# Allegro board CC2650_SensorTag.brd
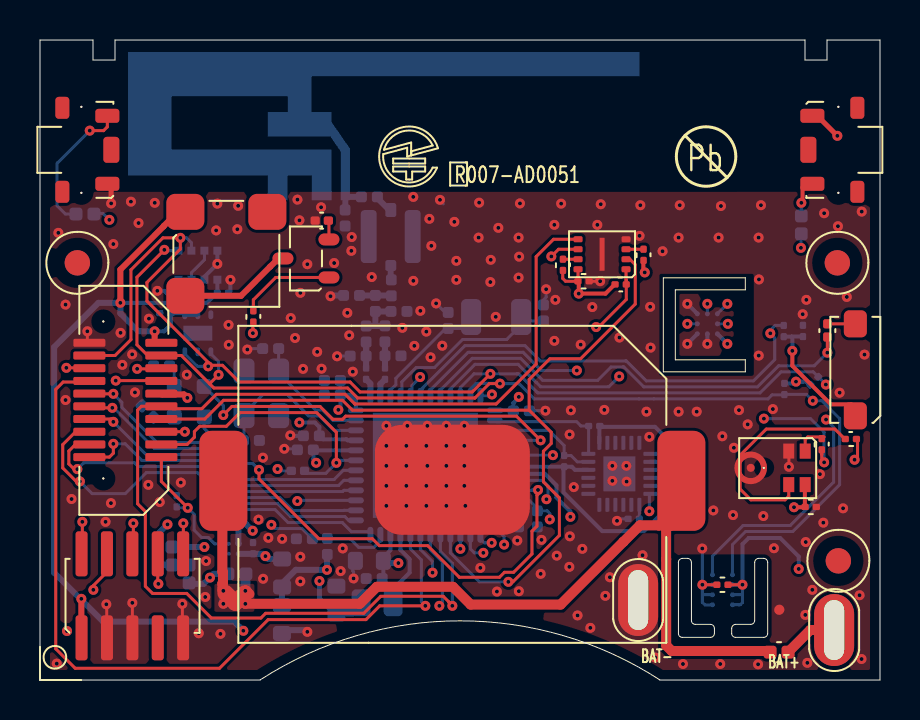
[diagram p0: board, top side]
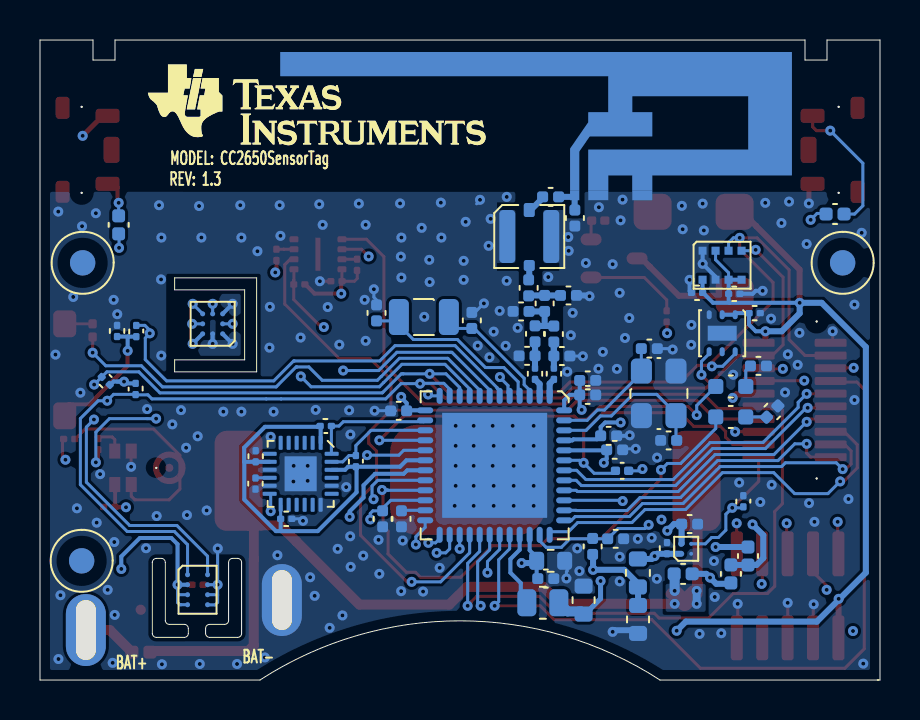
[diagram p1: board, bottom side, seen from below]

Outline 42 x 32 mm; copper layers: TOP, L2, L3, BOTTOM. Coordinates in mm from the lower left corner of the outline.
Outline path: 0,32 0,0 11,0 arc(21,2.96) 31,0 42,0 42,32 39.35,32 39.35,31 38.25,31 38.25,32 3.75,32 3.75,31 2.65,31 2.65,32 0,32 ; 31.17,20.11 31.17,15.41 35.27,15.41 35.27,16.01 31.77,16.01 31.77,19.51 35.27,19.51 35.27,20.11 31.17,20.11 ; 31.92,5.88 31.92,2.33 arc(31.98,2.19) 32.12,2.13 33.52,2.13 arc(33.66,2.19) 33.72,2.33 33.72,2.58 arc(33.66,2.72) 33.52,2.78 32.77,2.78 arc(32.63,2.84) 32.57,2.98 32.57,5.88 arc(32.51,6.02) 32.37,6.08 32.12,6.08 arc(31.98,6.02) 31.92,5.88 ; 34.58,2.58 arc(34.64,2.72) 34.78,2.78 35.53,2.78 arc(35.68,2.84) 35.73,2.98 35.73,5.88 arc(35.79,6.02) 35.93,6.08 36.18,6.08 arc(36.33,6.02) 36.38,5.88 36.38,2.33 arc(36.33,2.19) 36.18,2.13 34.78,2.13 arc(34.64,2.19) 34.58,2.33 34.58,2.58

## Placement (name value [footprint] x y rotation side)
A1  2.4GHz  [ANTENNA_DN007AN]  15.27 24.24 180 bottom
ANT1  2nH  [INDC1005X60L]  16.77 18.43 90 bottom
ANT2  DNM  [CAPC1005X60L]  18.35 18.43 180 bottom
ANT3  1pF  [CAPC1005X60L]  15.18 19.23 0 bottom
ANT4  2nH  [INDC1005X60L]  17.57 19.21 90 bottom
ANT5  0  [RESC1005X40L]  16.87 24.16 180 bottom
ANT6  0.5pF  [CAPC1005X60L]  15.26 22.7 90 bottom
BAT+  BAT+  [PAD_S2000OBL3600_1000M3000]  39.71 2.5 0 top
BAT-  BAT-  [PAD_S2000OBL3600_1000M3000]  29.91 4 0 top
BT1  BAT-HLD-001  [BAT_BATHLD001AL]  32.07 9.96 180 top
BZ1  HCS0503B  [BUZ_HCS0503BN]  7.27 23.41 270 top
C1  DNM  [CAPC1608X90L]  12.1 3.73 270 bottom
C2  100nF  [CAPC1005X60L]  23.67 13.46 0 bottom
C3  100nF  [CAPC1005X60L]  24.87 8.46 270 bottom
C4  100nF  [CAPC1005X60L]  13.67 11.51 180 bottom
C5  22uF  [CAPC1608X90N]  17.17 5.96 180 bottom
C6  100nF  [CAPC1005X60L]  17.11 5.07 180 bottom
C7  10uF  [CAPC1608X90N]  14.82 3.29 90 bottom
C8  100nF  [CAPC1005X60L]  15.01 14.98 180 bottom
C9  100nF  [CAPC1005X60L]  13.97 12.21 180 bottom
C11  1pF  [CAPC1005X60L]  16.31 16.9 90 bottom
C12  100nF  [CAPC1005X60N]  13.62 7.06 180 bottom
C13  1pF  [CAPC1005X60L]  18.05 16.21 180 bottom
C14  12pF  [CAPC1005X60L]  20.41 17.58 90 bottom
C15  12pF  [CAPC1005X60L]  25.17 17.95 90 bottom
C16  1uF  [CAPC1005X60L]  23.93 8.46 270 bottom
C17  DNM_0402  [CAPC1005X60L]  11.13 16.57 0 bottom
C18  DNM_0402  [CAPC1005X60L]  10.97 11.98 180 bottom
C19  100nF  [CAPC0603X35L]  8.87 19.36 0 bottom
C20  100nF  [CAPC0603X35L]  7.57 19.31 180 bottom
C21  100nF  [CAPC0603X35L]  38.15 17.17 90 bottom
C22  100nF  [CAPC0603X35L]  34.4 4.76 180 top
C23  100nF  [CAPC0603X35L]  38.26 8.65 0 top
C24  100nF  [CAPC0603X35L]  6.55 18.34 180 bottom
C25  100nF  [CAPC0603X35L]  29.97 8.06 180 bottom
C26  10nF  [CAPC0603X35L]  31.22 10.91 90 bottom
C27  100nF  [CAPC0603X35L]  31.23 9.54 90 bottom
C28  100nF  [CAPC0603X35L]  26.9 19.94 0 top
C29  1uF  [CAPC1005X60L]  9.92 7.8 180 bottom
C30  100nF  [CAPC0603X35L]  10.65 6.31 90 bottom
C31  DNM  [CAPC1005X60L]  14.22 14.26 0 bottom
C32  15pF  [CAPC0603X35N]  16.3 15.03 90 bottom
C33  15pF  [CAPC0603X35N]  17.25 15.03 90 bottom
CR1  LS L296-P2Q2-1  [LEDC1708X67L]  6.71 14.68 0 bottom
CR3  LPL296-J2L2-25  [LEDC1707X65L]  6.71 13.15 0 bottom
FIDU1  FIDU_1.27mm  [FID127X142]  39.87 20.86 0 top
FIDU2  FIDU_1.27mm  [FID127X142]  39.92 5.96 0 top
FIDU3  FIDU_1.27mm  [FID127X142]  1.87 20.86 0 top
FIDU4  FIDU_1.27mm  [FID127X142]  1.87 20.86 180 bottom
FIDU5  FIDU_1.27mm  [FID127X142]  39.87 20.86 180 bottom
FIDU6  FIDU_1.27mm  [FID127X142]  39.92 5.96 180 bottom
FL1  BLM18HE152SN1  [FIL_BLM18HE152SN1DL]  12.11 4.65 90 bottom
J1  MS-156HF  [HIROSE_MS156HFN]  17.54 23.5 270 bottom
J2  LSS-110-01-F-DV-A-TR  [SAMTEC_LSS-110-01-F-DV-A-TR-20N]  6.07 16.86 180 top
L1  10uH  [INDC2012X150L]  17.66 3.86 180 bottom
L2  2.4nH  [INDC1005X60L]  16.31 16.2 180 bottom
L3  2.4nH  [INDC1005X60L]  17.25 16.91 90 bottom
NOREF  -  []  35.34 2.13 90 top
NOREF#2  -  []  38.25 31.41 0 top
NOREF#3  -  []  31.17 18.42 0 top
NOREF#4  -  []  41.33 0 90 top
NOREF#5  -  []  3.16 31 90 top
NOREF#6  -  []  34.44 19.51 90 top
NOREF#7  -  []  39.35 31.5 0 top
NOREF#8  -  []  3.75 31.49 0 top
NOREF#9  -  []  0 31.7 0 top
NOREF#10  -  []  31.92 3.6 0 top
P1  BB02-BS101-KA8-025B00  [GRADCON_BB02BS101KA8025B00L]  2.08 2.11 0 top
Q1  BC846B  [SOT95P237X130-3N]  14.45 20.13 90 top
R1  100k  [RESC1005X40L]  14.37 7.08 270 bottom
R2  10k  [RESC0603X35L]  38.91 15.15 225 bottom
R3  10k  [RESC0603X35L]  37.22 14.27 90 bottom
R4  10k  [RESC0603X35L]  27.43 12.7 0 bottom
R5  10k  [RESC0603X35L]  26.21 11.22 270 bottom
R6  200k  [RESC0603X35N]  12.57 10.46 0 bottom
R7  10k  [RESC0603X35L]  10.67 18.46 270 top
R8  5.1  [RESC0603X35N]  13.76 22.97 0 top
R9  0  [RESC1005X40N]  6.6 5.75 90 bottom
R10  680  [RESC1005X40L]  5.68 15.71 0 bottom
R11  0  [RESC0603X35N]  39.37 17.15 90 top
R12  0  [RESC1005X40N]  10.29 5.31 180 bottom
R16  2.2k  [RESC0603X35L]  29.31 19.78 180 top
R17  10k  [RESC0603X35L]  26.15 21.04 270 top
R18  10k  [RESC0603X35L]  30.18 21.54 270 top
R21  270  [RESC1005X40N]  38.07 23.21 270 bottom
R22  270  [RESC1005X40N]  1.8 23.3 0 bottom
R23  DNM  [RESC1005X40N]  7.46 5.75 270 bottom
R26  0  [RESC1005X40N]  37.4 1.39 180 top
R27  150  [RESC1005X40L]  5.11 13.71 315 bottom
R28  100k  [RESC0603X35L]  6.83 9.22 270 bottom
R31  0  [RESC0603X35L]  40.26 12.05 0 top
R32  0  [RESC0603X35L]  39.09 12.07 270 top
R50  2.2k  [RESC0603X35L]  37.19 17.73 270 bottom
SW1  MTA2-WNC  [SW_MTA2CN]  38.62 28.21 270 top
SW2  MTA2-WNC  [SW_MTA2CN]  3.37 24.81 90 top
SW3  MK24-A  [SW_MK24L]  40.77 13.21 90 top
U1  CC26xx-7x7  [QFNFC50P700X700X80-49CL]  16.52 14.21 0 bottom
U2  TPS22910AYZV  [BGAFC4C50P89X89X50]  9.94 6.31 180 bottom
U3  BMP280  [XDCR_BMP280N]  8.87 21.46 270 bottom
U4  TMP007  [BGAFC8C50P187X189X63]  32.87 17.31 90 bottom
U6  SPH0641LU4H  [MIC_SPH0641LM4H-1BN]  38.26 11.45 180 top
U7  OPT3001  [SON65P200X200X65-7L]  7.24 18.26 0 bottom
U8  MPU-9250  [QFNFC40P300X300X105-25N]  27.97 11.86 0 bottom
U9  HDC1000YPA  [BGAFC8C50P159X204X68]  34.62 5.26 270 bottom
U10  W25X40CLUXI  [SON50P300X200X60-9A2L]  29.3 20.54 90 top
UNK#REFDES  -  []  35.6 30.77 180 bottom
Y1  32.768kHz  [XTAL_FC-135N]  21.56 18.15 0 bottom
Y2  24MHz  [OSCCC250X320X60-4L]  11.93 15.45 270 bottom

## Library data of the parts
A1 = ANTENNA_DN007
ANT1 ANT4 L2 L3 = INDUCTOR: alternate symbols: (INDC1005X60L,INDC1005X60M)
ANT2 ANT3 ANT6 C2-C4 C6 C8 C9 C11-C18 C29 C31 = CAPACITOR: alternate symbols: (CAPC1005X60L,CAPC1005X60M)
ANT5 R1 R9 R10 R12 R21-R23 R26 R27 = RESISTOR: alternate symbols: (RESC1005X40L,RESC1005X40M)
BAT+ = BAT+
BAT- = BAT-
BT1 = BATT_3PINS: User Part Number: #PN; alternate symbols: (BAT_BATHLD001L,BAT_BATHLD001M,BAT_BATHLD001AL,BAT_BATHLD001AM)
BZ1 = BUZZER_3PINS: alternate symbols: (BUZ_HCS0503BL,BUZ_HCS0503BM)
C1 C5 C7 = CAPACITOR: alternate symbols: (CAPC1608X90L,CAPC1608X90M)
C19-C28 C30 C32 C33 = CAPACITOR: alternate symbols: (CAPC0603X35L,CAPC0603X35M)
CR1 = LED: alternate symbols: (LEDC1708X67L,LEDC1708X67M)
CR3 = LED: alternate symbols: (LEDC1707X65L,LEDC1707X65M)
FIDU1-FIDU6 = FIDMARK
FL1 = FILTER_2PIN: alternate symbols: (FIL_BLM18HE152SN1DL,FIL_BLM18HE152SN1DM)
J1 = CONN_COAX_MS-156HF: alternate symbols: (HIROSE_MS156HFL,HIROSE_MS156HFM)
J2 = CONN_SOCKET_2X10_J_V1: alternate symbols: (SAMTEC_LSS-110-01-F-DV-A-TR-20L,SAMTEC_LSS-110-01-F-DV-A-TR-20M)
L1 = INDUCTOR: alternate symbols: (INDC2012X150L,INDC2012X150M)
P1 = CONN_HEADER_2X5_P: User Part Number: #PN; alternate symbols: (GRADCON_BB02BS101KA8025B00L,GRADCON_BB02BS101KA8025B00M)
Q1 = TRANSISTOR_NPN_BEC_CIR: alternate symbols: (SOT95P237X130-3L,SOT95P237X130-3M)
R2-R8 R11 R16-R18 R28 R31 R32 R50 = RESISTOR: alternate symbols: (RESC0603X35L,RESC0603X35M)
SW1 SW2 = SWITCH_2PIN
SW3 = SWITCH_REED: alternate symbols: (SW_MK24L,SW_MK24M)
U1 = IC_RF_CC26XX_QFN48_V2: alternate symbols: (QFNFC50P700X700X80-49CL,QFNFC50P700X700X80-49CM)
U2 = IC_PM_TPS22910A_DSBGA4: User Part Number: #PN
U3 = IC_PERIPH_BMP280
U4 = IC_PERIPH_TMP007_DSBGA8: User Part Number: #PN
U6 = IC_PERIPH_SPH0641LM4H-1
U7 = IC_PERIPH_OPT3001_SON6: User Part Number: #PN; alternate symbols: (SON65P200X200X65-7L,SON65P200X200X65-7M)
U8 = IC_ACC_MPU-9250_QFN24: alternate symbols: (QFNFC40P300X300X105-25L,QFNFC40P300X300X105-25M)
U9 = IC_PERIPH_HDC1000_BGA8: User Part Number: #PN
U10 = IC_FLASH_W25X40CL_USON8: User Part Number: #PN; alternate symbols: (SON50P300X200X60-9A2L,SON50P300X200X60-9A2M)
Y1 = CRYSTAL: alternate symbols: (XTAL_FC-135L,XTAL_FC-135M)
Y2 = XTAL_4PIN_S: alternate symbols: (OSCCC250X320X60-4L,OSCCC250X320X60-4M)

## Footprints (pads in the part's own frame, mm; a bottom-side part is the same pattern mirrored in y, then rotated)
ANTENNA_DN007AN
  rect 0.46x0.5 smd: 1(0,0)
  rect 1x0.5 smd: 2(1.18,0) 3(3.38,0)
BAT_BATHLD001AL
  custom 2.4x5 smd: 1(0,0) 2(22.9,0)
  custom 7.75x5.5 smd: 3(11.45,-0.05)
BGAFC4C50P89X89X50
  round 0.2 smd: A1(0,0) A2(0,0.5) B1(0.5,0) B2(0.5,0.5)
BGAFC8C50P159X204X68
  round 0.25 smd: A1(0,0) A2(0,1) B1(0.5,0) B2(0.5,1) C1(1,0) C2(1,1) D1(1.5,0) D2(1.5,1)
BGAFC8C50P187X189X63
  round 0.25 smd: A1(0,0) A2(0,0.5) A3(0,1) B1(0.5,0) B3(0.5,1) C1(1,0) C2(1,0.5) C3(1,1)
BUZ_HCS0503BN
  custom 1.798x1.9 smd: 1(0,0) 2(4.2,0) 3(0,4.1)
CAPC0603X35L
  custom 0.36x0.32 smd: 1(0,0) 2(0.56,0)
CAPC0603X35N
  custom 0.36x0.32 smd: 1(0,0) 2(0.56,0)
CAPC1005X60L
  custom 0.55x0.54 smd: 1(0,0) 2(0.8,0)
CAPC1005X60N
  custom 0.55x0.54 smd: 1(0,0) 2(0.8,0)
CAPC1608X90L
  custom 0.75x0.9 smd: 1(0,0) 2(1.4,0)
CAPC1608X90N
  custom 0.75x0.9 smd: 1(0,0) 2(1.4,0)
FID127X142
  round 1.27 smd: 1(0,0)
FIL_BLM18HE152SN1DL
  custom 0.75x0.9 smd: 1(0,0) 2(1.4,0)
GRADCON_BB02BS101KA8025B00L
  custom 0.6x2.25 smd: 1(0,0) 2(0,4.2) 3(1.27,0) 4(1.27,4.2) 5(2.54,0) 6(2.54,4.2) 7(3.81,0) 8(3.81,4.2) 9(5.08,0) 10(5.08,4.2)
HIROSE_MS156HFN
  custom 0.7x0.55 smd: 1(0,0)
  custom 0.55x0.55 smd: 2(2.775,0)
  custom 2.65x0.8 smd: 3(1.325,-1.1) 4(1.325,1.1)
INDC1005X60L
  custom 0.55x0.54 smd: 1(0,0) 2(0.8,0)
INDC2012X150L
  custom 0.95x1.35 smd: 1(0,0) 2(1.6,0)
LEDC1707X65L
  custom 0.75x0.75 smd: 1(0,0) 2(1.5,0)
LEDC1708X67L
  custom 0.75x0.75 smd: 1(0,0) 2(1.5,0)
MIC_SPH0641LM4H-1BN
  round 0.1 hole 0.6 unplated: (2.075,0.838)
  rect 0.55x0.75 smd: 1(0,0) 2(0.822,0) 4(0.822,1.675) 5(0,1.675)
  custom 1.626x1.626 smd: 3(2.724,0.838)
OSCCC250X320X60-4L
  custom 1.25x1.05 smd: 1(0,0) 2(2.23,0) 3(2.23,1.73) 4(0,1.73)
PAD_S2000OBL3600_1000M3000
  oval 2x3.6 hole 1x3: 1(0,0)
QFNFC40P300X300X105-25N
  custom 0.2x0.7 smd: 1(0,0) 2(0.4,0) 3(0.8,0) 4(1.2,0) 5(1.6,0) 6(2,0) 13(2,3.1) 14(1.6,3.1) 15(1.2,3.1) 16(0.8,3.1) 17(0.4,3.1) 18(0,3.1)
  custom 0.7x0.2 smd: 7(2.55,0.55) 8(2.55,0.95) 9(2.55,1.35) 10(2.55,1.75) 11(2.55,2.15) 12(2.55,2.55) 19(-0.55,2.55) 20(-0.55,2.15) 21(-0.55,1.75) 22(-0.55,1.35) 23(-0.55,0.95) 24(-0.55,0.55)
  rect 1.6x1.75 smd: 25(1,1.55)
QFNFC50P700X700X80-49CL
  oval 0.3x0.8 smd: 1(0,0) 2(0.5,0) 3(1,0) 4(1.5,0) 5(2,0) 6(2.5,0) 7(3,0) 8(3.5,0) 9(4,0) 10(4.5,0) 11(5,0) 12(5.5,0) 25(5.5,6.95) 26(5,6.95) 27(4.5,6.95) 28(4,6.95) 29(3.5,6.95) 30(3,6.95) 31(2.5,6.95) 32(2,6.95) 33(1.5,6.95) 34(1,6.95) 35(0.5,6.95) 36(0,6.95)
  oval 0.8x0.3 smd: 13(6.225,0.725) 14(6.225,1.225) 15(6.225,1.725) 16(6.225,2.225) 17(6.225,2.725) 18(6.225,3.225) 19(6.225,3.725) 20(6.225,4.225) 21(6.225,4.725) 22(6.225,5.225) 23(6.225,5.725) 24(6.225,6.225) 37(-0.725,6.225) 38(-0.725,5.725) 39(-0.725,5.225) 40(-0.725,4.725) 41(-0.725,4.225) 42(-0.725,3.725) 43(-0.725,3.225) 44(-0.725,2.725) 45(-0.725,2.225) 46(-0.725,1.725) 47(-0.725,1.225) 48(-0.725,0.725)
  rect 5.25x5.25 smd: 49(2.75,3.475)
RESC0603X35L
  custom 0.36x0.32 smd: 1(0,0) 2(0.56,0)
RESC0603X35N
  custom 0.46x0.42 smd: 1(0,0) 2(0.66,0)
RESC1005X40L
  custom 0.55x0.54 smd: 1(0,0) 2(0.8,0)
RESC1005X40N
  custom 0.65x0.64 smd: 1(0,0) 2(0.9,0)
SAMTEC_LSS-110-01-F-DV-A-TR-20N
  round 0.1 hole 0.9 unplated: (2.9,6.782) (2.9,-1.067)
  custom 1.6x0.4 smd: 1(0,0) 2(3.6,0) 3(0,0.635) 4(3.6,0.635) 5(0,1.27) 6(3.6,1.27) 7(0,1.905) 8(3.6,1.905) 9(0,2.54) 10(3.6,2.54) 11(0,3.175) 12(3.6,3.175) 13(0,3.81) 14(3.6,3.81) 15(0,4.445) 16(3.6,4.445) 17(0,5.08) 18(3.6,5.08) 19(0,5.715) 20(3.6,5.715)
SON50P300X200X60-9A2L
  custom 0.3x0.45 smd: 1(0,0) 2(0.5,0) 3(1,0) 4(1.5,0) 5(1.5,2.4) 6(1,2.4) 7(0.5,2.4) 8(0,2.4)
  rect 1.651x0.249 smd: 9(0.75,1.2)
SON65P200X200X65-7L
  oval 0.25x0.45 smd: 1(0,0) 2(0.65,0) 3(1.3,0) 4(1.3,1.85) 5(0.65,1.85) 6(0,1.85)
  rect 1.45x0.75 smd: 7(0.65,0.925)
SOT95P237X130-3N
  oval 0.6x1.05 smd: 1(0,0) 2(1.9,0) 3(0.95,2.3)
SW_MK24L
  custom 1.35x1.15 smd: 1(0,0) 2(4.6,0)
SW_MTA2CN
  round 0.1 hole 0.9 unplated: (-0.45,1.3) (3.85,1.3)
  custom 1.1x0.7 smd: (-0.4,2.25) (3.8,2.25)
  custom 1.3x0.8 smd: (1.7,-0.2)
  custom 0.7x1.2 smd: 1(0,0) 2(3.4,0)
XDCR_BMP280N
  rect 0.4x0.4 smd: 1(0,0) 2(0,0.65) 3(0,1.3) 4(0,1.95) 5(1.45,1.95) 6(1.45,1.3) 7(1.45,0.65) 8(1.45,0)
XTAL_FC-135N
  custom 1x1.8 smd: 1(0,0) 2(2.5,0)

## Nets
GND: A1.2(GND_2) A1.3(GND_3) ANT2.1 ANT3.1 ANT6.1 BAT-.1 BT1.3(-) C1.2 C2.2 C3.2 C4.2 C5.2 C6.2 C7.2 C8.2 C9.2 C12.2 C13.1 C14.2 C15.2 C16.2 C17.1 C18.1 C19.2 C20.2 C21.2 C22.2 C23.2 C24.2 C25.2 C26.2 C27.1 C28.2 C29.2 C30.2 C31.1 J1.3 J1.4 J2.2 L2.2 P1.3 P1.5 P1.9 R8.1 R10.1 R27.1 R28.1 SW1.1 SW2.1 U1.49(VSS) U2.B1(GND) U3.1(GND#1) U3.7(GND#7) U4.A1(DGND) U4.A2(AGND) U4.C1(ADR0) U6.2(SELECT) U6.3(GND) U7.3(GND) U7.7(EGP/GND) U8.9(AD0/SDO) U8.11(FSYNC) U8.18(GND) U8.20(RESV_20) U8.25(EGP) U9.B2(GND) U9.C2(DNC) U9.D2(NDRDY) U10.4(GND) U10.9(EGP) Y2.2 Y2.4
VDD_8962: BZ1.1 C19.1 C20.1 C21.1 C22.1 C24.1 C28.1 C30.1 FL1.2 J2.1 P1.1 R2.2 R3.2 R6.1 R9.2 R16.2 R17.2 R18.2 R50.2 SW3.1 U1.39(DIO_26) U2.A1(VOUT) U3.2(CSB) U3.5(SDO) U3.6(VDDIO) U3.8(VDD) U4.A3(V+) U4.B1(ADR1) U7.1(VDD) U7.2(ADDR) U9.B1(VDD) U9.C1(ADR0) U9.D1(ADR1) U10.8(VCC)
VDD_BATT: BT1.1(+#1) BT1.2(+#2) R12.1 R26.2
VDDR: C7.1 C8.1 C9.1 C31.2 L1.2 U1.45(VDDR#45) U1.48(VDDR#48)
VDDS: C1.1 C2.1 C3.1 C4.1 C5.1 C6.1 FL1.1 R1.2 U1.13(VDDS2) U1.22(VDDS3) U1.34(VDDS_DCDC) U1.44(VDDS)
AUDIO DI: R32.2 U1.7(DIO_2)
BUTTON1: R21.2 U1.9(DIO_4)
BUTTON2: R22.2 U1.5(DIO_0)
BUZZER: R7.2 U1.31(DIO_21)
DCDC_SW: L1.1 U1.33(DCDC_SW)
DEVPACK->VDD: J2.9 R9.1 R23.1
DP0: J2.20 U1.38(DIO_25)
DP1: J2.18 U1.37(DIO_24)
DP2: J2.16 U1.36(DIO_23)
DP3: J2.14 U1.40(DIO_27)
DP4/UART_RX: J2.12 U1.41(DIO_28)
DP5/UART_TX: J2.10 U1.42(DIO_29)
DP6/AUDIO DO: J2.8 U1.32(DIO_22)
DP7/AUDIO CLK: J2.6 R31.2 U1.17(DIO_11)
DP8/SCLK/TDI: J2.15 P1.8 U1.27(DIO_17) U10.6(CLK)
DP9/MISO: J2.13 U1.28(DIO_18) U10.2(DO/IO1)
DP10/MOSI: J2.11 U1.29(DIO_19) U10.5(DI/IO0)
DP11/CSN: J2.7 U1.30(DIO_20)
DP12/AUDIO FS/TDO: J2.5 P1.6 U1.26(DIO_16)
DP_ID: J2.17 R6.2 U1.43(DIO_30)
FLASH_CS: R16.1 U1.20(DIO_14) U10.1(NCS)
JTAG_TCK: P1.4 U1.25(JTAG_TCKC)
JTAG_TMS: P1.2 U1.24(JTAG_TMSC)
LED1: CR1.2(A) U1.16(DIO_10)
LED2: CR3.2(A) U1.21(DIO_15)
MIC PWR: C23.1 U1.19(DIO_13) U6.5(VDD)
MPU INT: U1.12(DIO_7) U8.12(INT)
MPU PWR: C25.1 C26.1 R4.2 R5.2 U1.18(DIO_12) U8.1(RESV_1) U8.8(VDDIO) U8.13(VDD) U8.22(NCS)
NRESET: C12.1 P1.10 R1.1 U1.35(RESET_N)
POWER GOOD: J2.19 R28.2 U2.B2(ON)
REED: R11.1 U1.8(DIO_3)
SCL: J2.3 R3.1 U1.11(DIO_6) U3.4(SCK) U4.B3(SCL) U7.4(NCLK) U9.A1(SCL)
SCL HP: R5.1 U1.15(DIO_9) U8.23(SCL/SCLK)
SDA: J2.4 R2.1 U1.10(DIO_5) U3.3(SDI) U4.C3(SDA) U7.6(DATA) U9.A2(SDA)
SDA HP: R4.1 U1.14(DIO_8) U8.24(SDA/SDI)
TMP RDY: R50.1 U1.6(DIO_1) U4.C2(NALERT)
N256047: CR1.1(C) R10.2
N546170: C27.2 U8.10(REGOUT)
N553359: BZ1.2 Q1.3(COLLECTOR)
N553749: Q1.1(BASE) R7.1
N553802: Q1.2(EMITTER) R8.2
N567147: C29.1 R12.2 R23.2 U2.A2(VIN)
N570925: C16.1 U1.23(DCOUPL)
N571021: C14.1 U1.3(X32K_Q1) Y1.1
N571113: C18.2 U1.46(X24M_N) Y2.3
N574713: C11.1 C32.2 L2.1
N574825: C13.2 C33.2 L3.1
N574829: ANT1.1 ANT2.2 C11.2 L3.2
N584161: C17.2 U1.47(X24M_P) Y2.1
N591795: ANT1.2 ANT3.2 ANT4.1
N593616: R21.1 SW1.2
N593675: R22.1 SW2.2
N595089: C15.1 U1.4(X32K_Q2) Y1.2
N606617: ANT4.2 J1.2
N607699: A1.1(FEED_1) ANT5.2 ANT6.2
N615152: R17.1 U10.7(NHOLD)
N615160: R18.1 U10.3(NWP)
N620089: BAT+.1 R26.1
N624014: CR3.1(C) R27.2
N629965: C32.1 U1.1(RF_P)
N629990: C33.1 U1.2(RF_N)
N631854: ANT5.1 J1.1
N674409: R31.1 U6.4(CLOCK)
N674491: R32.1 U6.1(DATA)
N703623: R11.2 SW3.2

Pads without a net: BZ1 3; FIDU1 1; FIDU2 1; FIDU3 1; FIDU4 1; FIDU5 1; FIDU6 1; P1 7; U7 5; U8 2 3 4 5 6 7 14 15 16 17 19 21

## Via types
v1: diameter 0.5, hole 0.2, TOP to BOTTOM, 308 vias

## Routing (per net, layer and track width the routed paths; a pad name or vN(x,y) marks a point on that pad's centre or on a via; arc(x,y) is an arc through that point)
GND: length 35.6
  TOP w0.15: 4.62,2.17 v1(4.62,3.86) ; 4.62,2.17 4.61,2.16 ; 4.62,2.17 P1.5 ; P1.9 7.16,2.15 7.12,2.19 v1(7.12,3.81) ; 3.42,2.26 3.35,2.19 P1.3 ; C22.2 33.12,4.76 v1(33.12,4.76) ; J2.2 2.37,16.96 v1(2.37,17.44) ; 37.45,11.33 v1(37.45,10.66) ; 3.34,2.16 3.34,3.69 3.32,3.71 v1(3.32,3.79) ; C28.2 v1(28.01,19.94)
  TOP w0.25: v1(39.87,27.21) 38.87,28.21 SW1.1 ; v1(3.56,23.83) 3.56,24.62 SW2.1
  TOP w0.5: 36.96,3.51 36.97,3.52
  L3 w0.2: 34.52,16.31 33.87,16.31 v1(33.37,16.81) ; 39.19,23.86 39.21,23.84 v1(39.21,23.34)
  L3 w0.25: v1(39.87,27.21) 39.87,25.33 39.19,24.66 39.19,23.86
  BOTTOM w0.15: 20.57,18.35 20.29,18.35 v1(19.8,18.83) ; 10.37,16.51 10.43,16.57 C17.1 ; 24.23,13.46 C2.2 24.71,13.46 24.71,13.46 v1(25.27,13.46) ; 33.12,4.25 33.13,4.26 U9.C2 ; 33.12,4.25 33.12,3.88 33.25,3.76 33.61,3.76 U9.D2 ; 33.12,4.25 v1(33.12,4.76) ; v1(33.12,4.76) 33.12,6.44 33.11,6.45 v1(33.11,6.58) ; v1(33.12,4.76) U9.B2 ; L2.2 14.87,16.2 v1(14.86,16.19) ; 20.17,23.81 20,23.98 v1(20,24.01) ; C5.2 15.64,5.83 15.64,5.45 15.68,5.41 v1(15.68,5.08) ; C25.2 28.95,8.06 v1(28.85,7.96) ; v1(12.22,11.56) 12.76,11.56 12.76,11.56 13.06,11.56 ; v1(25.31,19.54) 25.31,19.14 25,18.83
  BOTTOM w0.2: U4.A2 v1(33.37,16.81) ; C20.2 6.37,19.31 6.22,19.46 v1(5.87,19.46) ; v1(9.52,20.01) 9.52,19.45 C19.2 ; v1(12.52,12.23) 12.54,12.21 C9.2 ; U4.A1 v1(32.37,16.81) ; 30.52,12.16 v1(30.47,12.16) ; U4.C1 v1(32.37,18.81) ; U3.1 8.87,21.46 v1(8.87,20.81) 8.22,20.16 U3.7
  BOTTOM w0.3: ANT3.1 14.57,19.23 v1(14.53,19.19) ; C1.2 12.26,2.49 13.29,2.49 v1(13.37,2.41)
  vias: v1(0.84,0.82) v1(0.92,22.36) v1(1.28,18.77) v1(1.28,14) v1(1.58,9.05) v1(3.28,7.91) v1(3.55,8.84) v1(3.67,21.8) v1(4.03,17.36) v1(4.12,15.76) v1(4.55,23.92) v1(4.61,16.28) v1(4.75,14.38) v1(4.93,22.85) v1(5.45,18.07) v1(5.42,9.76) v1(5.74,23.86) v1(5.99,8.9) v1(7.04,9.87) v1(7.34,15.26) v1(7.94,2.34) v1(8.3,5.95) v1(8.26,4.15) v1(8.81,22.48) v1(8.87,23.82) v1(9.02,2.31) v1(9.43,17.75) v1(9.44,16.76) v1(9.91,23.71) v1(9.87,22.54) v1(10.37,16.52) v1(10.93,8.02) v1(11.15,11.12) v1(11.16,5.06) v1(11.42,7.11) v1(12.11,7.06) v1(12.54,18.1) v1(12.75,17.1) v1(12.87,24.02) v1(12.97,22.98) v1(13.02,19.36) v1(13.02,6.16) v1(13.02,4.93) v1(13.15,15.56) v1(13.37,20.79) v1(13.86,16.41) v1(14.05,23.64) v1(14.08,15.56) v1(14.71,20.85) v1(15.03,5.45) v1(15.14,6.58) v1(15.37,18.36) v1(15.46,17.23) v1(15.59,22.15) v1(15.57,21.46) v1(15.64,15.42) v1(16.59,20.15) v1(17.32,12.71) v1(17.32,11.71) v1(17.32,10.71) v1(17.32,9.71) v1(17.32,8.71) v1(18.12,17.61) v1(18.32,11.71) v1(18.32,10.71) v1(18.32,9.71) v1(18.32,8.71) v1(18.37,12.71) v1(18.66,24.16) v1(18.67,19.96) v1(18.72,16.71) v1(19.02,18.46) v1(19.32,17.42) v1(19.32,11.71) v1(19.32,9.71) v1(19.32,8.71) v1(19.37,12.71) v1(19.37,10.71) v1(19.47,23.06) v1(19.53,16.14) v1(19.57,21.71) v1(20.11,16.71) v1(20.32,12.71) v1(20.32,11.71) v1(20.32,10.71) v1(20.32,9.71) v1(20.32,8.71) v1(20.72,22.91) v1(20.82,20.96) v1(20.82,20.01) v1(21.22,12.71) v1(21.22,11.71) v1(21.22,10.71) v1(21.22,9.71) v1(21.27,8.71) v1(21.93,22.12) v1(21.96,23.87) v1(22.02,5.61) v1(22.54,21.01) v1(22.52,19.9) v1(22.79,18.16) v1(22.85,4.42) v1(22.92,22.61) v1(23.93,22.12) v1(23.93,20.12) v1(23.87,6.97) v1(23.94,4.44) v1(24,23.83) v1(23.96,21.17) v1(25.03,5.31) v1(25.07,7.01) v1(25.72,22.76) v1(25.72,16.96) v1(25.77,19.01) v1(25.84,6.22) v1(26.06,23.82) v1(26.54,13.48) v1(26.48,12.28) v1(26.49,7.18) v1(26.47,5.66) v1(26.69,9.64) v1(26.88,3.23) v1(27.03,16.77) v1(27.12,6.56) v1(27.52,2.61) v1(27.61,18.65) v1(27.87,22.76) v1(28.04,23.79) v1(28.22,13.51) v1(28.27,4.21) v1(28.49,5.14) v1(28.62,10.71) v1(28.62,9.96) v1(28.97,17.12) v1(29.32,10.71) v1(29.33,9.92) v1(30.02,23.74) v1(29.98,22.21) v1(30.13,6.24) v1(30.32,13.42) v1(30.51,18.66) v1(30.53,16.62) v1(30.76,1.13) v1(31.13,21.44) v1(31.93,22.12) v1(31.93,13.42) v1(31.99,23.74) v1(32.15,0.8) v1(32.84,13.42) v1(33.67,8.48) v1(33.93,22.12) v1(34.05,23.7) v1(34.01,0.8) v1(34.12,12.19) v1(34.69,11.61) v1(34.65,8.25) v1(34.95,13.49) v1(35.38,12.78) v1(35.93,22.12) v1(35.95,20.03) v1(35.94,16.22) v1(35.9,0.79) v1(36.05,23.74) v1(36.17,8.2) v1(36.64,13.55) v1(36.7,6.59) v1(38.14,18.29) v1(38.32,19.01) v1(38.29,6.9) v1(38.27,3.25) v1(38.37,0.86) v1(38.62,4.51) v1(39,10.29) v1(39.17,7.87) v1(39.9,22.69) v1(39.98,14.37) v1(40.15,8.58) v1(40.34,19.15) v1(40.98,4.24) v1(41.09,23.42) v1(41.08,1.05) v1(41.23,16.27)
VDD_8962: length 164.5
  TOP w0.15: 2.07,2.16 2.08,2.15 P1.1 ; R17.2 26.14,20.47 26.14,20.08 26.28,19.94 C28.1 26.9,19.94 U10.8 ; v1(35.12,4.76) 35.12,4.76 C22.1
  TOP w0.2: v1(30.24,20.38) 30.17,20.45 30.17,20.97 R18.2 ; SW3.1 40.77,13.58 40.57,13.78 39.54,13.78 37.62,15.71 v1(37.62,16.46) ; C28.1 26.94,19.9 v1(26.94,19.32) 28.27,19.32 28.73,19.78 R16.2
  TOP w0.3: v1(5.73,17.44) 5.73,16.92 5.79,16.86 J2.1 ; v1(4.02,18.86) 4.02,20.52 6.18,22.68 6.18,22.69 6.9,23.41 BZ1.1 ; 2.07,2.16 v1(2.07,4.06)
  L2 w0.15: v1(32.37,17.81) 33.08,17.81 34.08,16.81 v1(34.37,16.81)
  L2 w0.2: 28.36,19.31 28.36,19.32 v1(26.94,19.32) ; 28.36,19.31 28.37,19.32 29.18,19.32 v1(30.24,20.38) ; 28.36,19.31 28.36,14.93 28.7,14.59 36.12,14.59 36.45,14.92 v1(37.8,14.92) 37.8,15.8 37.8,15.8 37.8,16.22 37.62,16.4 v1(37.62,16.46) 37.27,16.81 v1(34.37,16.81)
  L2 w0.3: 12.47,3.94 12.47,3.94 18.24,3.94 18.88,4.57 20.53,4.57 21.31,3.79 27.36,3.79 29.44,1.71 36.76,1.71 37.59,2.54 37.59,5.15 37.99,5.55 ; 12.47,3.94 10.99,2.46 v1(10.17,2.46) ; 12.47,3.94 12.46,3.94 12.46,6.17 ; 12.46,6.17 12.44,6.19 v1(11.27,6.19) 10.81,6.65 v1(8.22,6.65) ; 12.46,6.17 12.46,6.64 12.87,7.04 v1(12.87,8.95) 12.87,9.56 v1(11.88,10.55) ; 37.99,5.55 41.35,8.92 41.35,11.48 40.74,12.09 39.42,12.09 37.8,13.71 v1(37.8,14.92) ; 37.99,5.55 v1(37.94,5.55)
  BOTTOM w0.15: U3.2 8.22,21.01 7.57,20.36 U3.6 7.57,20.02 ; v1(12.87,8.95) 12.9,8.98 U1.39 ; v1(11.88,10.55) 11.97,10.46 R6.1 ; 35.12,4.27 35.12,3.88 35.01,3.77 34.95,3.77 34.95,3.76 U9.D1 ; 35.12,4.27 35.12,4.26 U9.C1 ; 35.12,4.27 v1(35.12,4.76) ; U4.B1 v1(32.37,17.81)
  BOTTOM w0.2: R50.2 37.59,17.17 ; 37.59,17.17 37.59,17.17 C21.1 ; 37.59,17.17 37.62,17.14 v1(37.62,16.46) ; 7.57,19.41 7.57,19.41 ; 7.57,19.41 C20.1 7.57,18.91 7.52,18.86 ; 7.57,19.41 7.57,20.01 U3.6 U3.5 ; 7.52,18.86 8.35,18.86 8.85,19.36 C19.1 8.87,19.36 U3.8 ; 7.52,18.86 v1(4.02,18.86) ; v1(37.94,5.55) 37.94,6.17 37.01,7.1 35.43,7.1 35.12,6.79 v1(35.12,4.76) U9.B1 ; v1(5.73,17.44) 6.21,17.44 6.55,17.77 C24.1 7.16,18.34 U7.1 U7.2 ; 38.52,14.76 38.49,14.76 38.32,14.92 37.8,14.92 v1(37.8,14.92) ; v1(37.8,14.92) 37.71,14.83 R3.2 ; v1(37.8,14.92) 38.15,14.92 ; U4.A3 v1(34.37,16.81)
  BOTTOM w0.3: U2.A1 C30.1 11.15,6.31 v1(11.27,6.19) 11.41,6.05 FL1.2 ; v1(10.17,2.46) 9.71,2.92 3.16,2.92 2.02,4.06 ; R9.2 v1(8.22,6.65) ; 2.02,4.06 v1(2.07,4.06) ; 2.02,4.06 0.71,5.37 0.71,16.65 2.92,18.86 v1(4.02,18.86) 4.02,18.33 4.91,17.44 v1(5.73,17.44)
VDD_BATT: length 48.9
  TOP w0.15: 9.12,7.96 9.12,9.27
  TOP w0.2: 9.12,9.27 9.17,9.32 BT1.2
  TOP w0.5: v1(10.27,4.46) 10.29,4.48 10.47,4.3 ; 9.12,7.96 9.12,5.42 9.15,5.39 9.15,4.85 9.12,4.82 9.12,4.51 v1(9.17,4.46) 9.27,4.36 ; v1(10.27,3.81) 15.99,3.81 16.84,4.66 20.65,4.66 21.53,3.77 26.03,3.77 29.18,6.92 29.18,6.92 29.99,7.73 30.93,7.73 30.93,7.73 31.57,7.73 32.07,8.23 BT1.1 31.31,9.2 31.31,6.04 31.31,6.04 31.31,1.73 31.59,1.45 36.45,1.45 R26.2
  TOP w0.8: 10.24,4.33 9.77,3.86 9.27,4.36
  BOTTOM w0.4: v1(9.17,3.81) v1(9.17,4.46)
  BOTTOM w0.5: v1(10.27,4.46) 10.27,5.28 R12.1
VDDR: length 20.7
  L2 w0.2: v1(14.92,13.51) 14.28,12.88 v1(12.97,12.88) 13.14,12.71 13.14,10.74 13.82,10.06 13.82,5.21 13.97,5.06 v1(13.97,4.95)
  BOTTOM w0.15: C9.1 14.02,12.26 14.02,12.36 ; 15.02,14.98 C8.1 ; C31.2 15.02,14.26
  BOTTOM w0.2: 15.02,14.26 15.01,14.26 C8.1 ; 15.02,14.26 15.02,13.61 v1(14.92,13.51) ; 15.02,14.26 15.52,14.26 15.79,13.98 U1.48 ; v1(12.97,12.88) 13.74,12.88 13.97,12.65 13.97,12.31 ; 13.97,12.31 14.02,12.36 ; 13.97,12.31 C9.1 13.98,12.21 14.16,12.04 15.33,12.04 15.38,11.98 U1.45
  BOTTOM w0.25: v1(13.97,4.95) 13.97,4.07 14.75,3.29 C7.1
  BOTTOM w0.5: L1.2 15.62,3.43 14.96,3.43 C7.1
VDDS: length 39.6
  L2 w0.3: v1(13.81,10.86) 13.81,10.86 14.39,10.29 14.39,6.03 ; v1(25.49,8.03) 23.75,8.03 23.69,8.09 ; 14.39,6.03 14.35,5.99 v1(14.35,5.51) ; 14.39,6.03 17.74,6.03 v1(17.92,5.85) 19.54,7.47 23.07,7.47 23.69,8.09 ; 23.69,8.09 23.69,13.91 v1(23.94,14.16)
  BOTTOM w0.15: v1(25.49,8.03) 25.49,8.33 25.36,8.46 C3.1 24.87,8.58 24.82,8.63 ; 24.82,8.63 24.82,8.61 ; 24.82,8.63 24.46,8.98 U1.22 ; 14.35,6.18 14.37,6.2 R1.2 ; 25.45,8.03 25.45,8.03 ; 13.64,11.48 C4.1
  BOTTOM w0.2: v1(25.49,8.03) 25.45,8.03 25.45,8.03 ; C6.1 17.17,5.13 C5.1 ; v1(23.94,14.16) 23.94,14.12 23.67,13.85 C2.1 23.64,13.48 U1.13 ; v1(13.81,10.86) 13.74,10.93 13.74,10.98 13.67,11.06 C4.1 ; C5.1 17.17,6.14 17.52,6.49 U1.34 ; C5.1 17.32,5.96 17.43,5.85 ; U1.44 13.64,11.48
  BOTTOM w0.3: 14.35,6.18 v1(14.35,5.51) 12.79,5.51 12.11,4.83 FL1.1 12.1,4.64 C1.1 ; 17.43,5.85 v1(17.92,5.85)
AUDIO DI: length 24.6
  TOP w0.15: v1(39.21,10.88) 39.09,11 39.09,11.28 39.09,11.28 R32.2
  L2 w0.153: v1(26.84,15.47) 28.11,14.21 35.06,14.21 v1(36.2,13.07)
  BOTTOM w0.15: v1(39.21,10.88) 39.21,12.39 38.53,13.07 36.65,13.07 ; 21.49,16.38 21.41,16.38 19.52,14.5 U1.7
  BOTTOM w0.153: v1(26.84,15.47) 25.07,15.47 24.15,16.38 21.49,16.38 ; v1(36.2,13.07) 36.65,13.07
BUTTON1: length 24.3
  L2 w0.15: v1(38.05,21.61) 37.15,20.71 31.26,20.71 29.54,18.98 29.54,15.75 v1(28.96,15.18)
  BOTTOM w0.15: R21.2 38.05,22.29 v1(38.05,21.61) ; 28.44,14.66 25.03,14.66 24.82,14.87 24.82,14.87 23.91,15.78 21.75,15.78 20.52,14.55 U1.9
  BOTTOM w0.153: 28.44,14.66 v1(28.96,15.18)
BUTTON2: length 21.8
  L2 w0.15: v1(19,15.15) 19,15.14 18.68,14.81 13.14,14.81 12.31,15.63 12.31,16.81 10.39,18.73 7.74,18.73 v1(3.47,23.01)
  BOTTOM w0.15: v1(3.47,23.01) 3.15,23.33 2.73,23.33 R22.2 ; U1.5 18.52,14.28 18.6,14.37 18.6,14.72 19,15.13 v1(19,15.15)
BUZZER: length 23.3
  TOP w0.15: R7.2 10.64,17.88 v1(10.64,17.34)
  L2 w0.15: v1(10.64,17.34) 11.68,16.31 11.68,11.43 13.49,9.61 13.49,4.64 13.8,4.34 18.09,4.34 18.71,4.96 19.22,4.96 v1(19.63,5.37)
  BOTTOM w0.15: U1.31 19.02,6.53 19.63,5.92 v1(19.63,5.37)
DCDC_SW: length 4
  BOTTOM w0.2: L1.1 17.78,3.86 17.96,4.04 17.96,4.85 18.48,5.37 18.48,6.05 18.02,6.51 U1.33
DEVPACK->VDD: length 12.3
  TOP w0.3: v1(7.37,14.11) 7.2,14.28 6.11,14.28 J2.9
  L2 w0.3: v1(7.37,14.11) 7.94,13.53 7.94,9.94 6.37,8.37 v1(6.37,7.78)
  BOTTOM w0.3: R23.1 6.6,5.75 R9.1 6.18,5.75 5.83,6.09 5.83,7.24 v1(6.37,7.78)
DP0: length 15.3
  TOP w0.15: v1(3.67,11.81) 3.67,11.34 3.47,11.14 J2.20
  BOTTOM w0.15: U1.38 15.19,8.48 15.18,8.47 12.65,8.47 12,9.12 9.97,9.12 8.12,10.97 5.1,10.97 4.26,11.81 v1(3.67,11.81)
DP1: length 17.7
  TOP w0.15: 1.79,10.61 1.8,10.61 v1(1.87,10.54) 1.7,10.54 1.44,10.8 1.44,11.45 1.75,11.76 2.45,11.76 J2.18
  BOTTOM w0.15: U1.37 15.43,7.98 15.24,8.17 12.53,8.17 11.88,8.82 9.84,8.82 8,10.67 4.92,10.67 4.73,10.86 2.19,10.86 v1(1.87,10.54)
DP2: length 20.5
  TOP w0.15: J2.16 1.78,12.41 1.14,11.77 1.14,10.6 1.81,9.93 v1(1.99,9.93)
  BOTTOM w0.15: v1(1.99,9.93) 2.6,9.32 4.27,9.32 5.32,10.37 7.88,10.37 9.72,8.52 11.75,8.52 12.4,7.87 15.11,7.87 15.57,7.42 16.48,7.42 16.52,7.38 U1.36
DP3: length 14.9
  TOP w0.15: J2.14 3.53,13.05 v1(3.67,12.91)
  BOTTOM w0.15: v1(3.67,12.91) 5.3,11.27 8.24,11.27 10.09,9.42 15.13,9.42 15.19,9.48 U1.40
DP4/UART_RX: length 15.1
  TOP w0.15: J2.12 2.54,13.61 v1(3.62,13.61)
  BOTTOM w0.15: U1.41 15.19,9.98 14.93,9.72 10.22,9.72 8.37,11.57 5.73,11.57 3.69,13.61 v1(3.62,13.61)
DP5/UART_TX: length 15.5
  TOP w0.15: v1(3.67,14.31) 2.48,14.31 J2.10 2.46,14.31
  BOTTOM w0.15: v1(3.67,14.31) 4.09,13.88 4.09,13.63 5.85,11.87 8.49,11.87 10.34,10.02 14.71,10.02 15.17,10.48 U1.42
DP6/AUDIO DO: length 38.9
  TOP w0.15: v1(19.27,3.71) 16.99,3.71 16.3,3.02 11.41,3.02 8.97,0.58 1.76,0.58 0.79,1.56 0.79,14.53 1.16,14.9 2.41,14.9 J2.8 2.41,15.01
  BOTTOM w0.15: v1(19.27,3.71) 19.27,3.72 19.07,3.92 19.07,6.01 18.52,6.56 U1.32
DP7/AUDIO CLK: length 69
  TOP w0.15: v1(1.32,15.61) 2.45,15.61 J2.6 ; R31.2 40.82,12.04 40.88,11.98 40.88,11.12 40.77,11.01 v1(40.73,11.01)
  L2 w0.15: v1(40.73,11.01) 40.66,11.01 38.8,9.15 26.11,9.15 25.79,9.46 25.79,10.89 25.65,11.03 v1(25.65,11.24)
  L3 w0.15: v1(25.65,11.24) 25.67,11.22 25.67,10.94 24.71,9.98 24.71,9.98 24.41,9.69 24.41,6.75 21.84,4.18 20.81,4.18 19.04,4.18 18.24,3.38 14.77,3.38 14.43,3.04 13.27,3.04 10.81,0.58 1.78,0.58 0.57,1.78 0.57,14.87 v1(1.32,15.61)
  BOTTOM w0.15: U1.17 23.82,11.48 24.06,11.24 v1(25.65,11.24)
DP8/SCLK/TDI: length 68.5
  TOP w0.15: v1(7.24,12.41) J2.15 ; v1(25.57,21.18) 25.93,21.54 U10.6 ; P1.8 5.89,4.9 5.92,4.87 v1(5.92,4.81)
  L2 w0.15: 5.5,12.41 5.55,12.46 5.55,15.76 8.22,18.43 10.26,18.43 11.98,16.72 11.98,15.55 13.01,14.51 20.05,14.51 21.54,16 25.65,16 26.26,16.61 26.26,20.49 v1(25.57,21.18) ; 5.5,12.41 v1(7.24,12.41) ; 5.5,12.41 4.93,12.41 4.51,12 4.51,8.75 5.92,7.34 v1(5.92,4.81)
  L3 w0.15: v1(5.92,4.81) 5.92,2.51 6.65,1.78 10.31,1.78 12.82,4.28 13.98,4.28 14.28,4.58 17.74,4.58 19.32,6.16 20.62,6.16 v1(21.02,6.56)
  BOTTOM w0.15: U1.27 v1(21.02,6.56)
DP9/MISO: length 45
  TOP w0.15: 24.46,13.49 25.56,12.39 25.56,11.83 25.17,11.44 25.17,9.9 25.97,9.1 25.97,7.23 23.65,4.91 v1(23.42,4.91) ; 24.46,13.49 15.62,13.49 15.13,13.98 9.17,13.98 8.24,13.05 J2.13 ; 24.46,13.49 24.46,15.02 25.5,16.06 27.03,16.06 29.76,18.8 29.76,20.77 29.49,21.04 U10.2
  BOTTOM w0.15: U1.28 20.52,6.36 21.97,4.91 v1(23.42,4.91)
DP10/MOSI: length 58.6
  TOP w0.15: v1(20.62,3.71) 20.44,3.88 20.44,3.91 20.16,4.18 17.04,4.18 16.19,3.33 11.28,3.33 11.05,3.1 8.57,3.1 7.34,4.33 5.63,4.33 5.27,4.69 5.27,8.42 4.88,8.81 4.88,13.5 5.07,13.68 J2.11 6.51,13.68 6.63,13.57 8.1,13.57 8.81,14.28 15.26,14.28 15.74,13.8 15.75,13.8 15.75,13.8 22.81,13.8 24.81,15.8 24.81,21.17 25.68,22.04 U10.5
  BOTTOM w0.15: U1.29 20.02,6.43 20.62,5.83 v1(20.62,3.71)
DP11/CSN: length 41.2
  TOP w0.15: 5.83,14.97 5.85,14.95 J2.7 ; 5.83,14.97 5.75,15.05 ; 5.83,14.97 v1(3.79,14.97)
  L2 w0.15: v1(3.79,14.97) 3.27,14.97 0.63,12.33 0.63,2.5 1.4,1.72 10.87,1.72 12.7,3.55 18.41,3.55 19.05,4.2 19.48,4.2 v1(19.97,3.71)
  BOTTOM w0.15: U1.30 19.52,6.51 20.12,5.91 20.12,3.86 v1(19.97,3.71)
DP12/AUDIO FS/TDO: length 43.3
  TOP w0.15: J2.5 6.04,15.56 v1(4.86,15.56) ; P1.6 4.67,6.36 v1(4.67,7.84)
  L2 w0.15: v1(1.35,2.45) 0.99,2.81 0.99,4.16 v1(4.67,7.84) 4.14,8.36 4.14,14.53 4.86,15.25 v1(4.86,15.56)
  L3 w0.15: v1(1.35,2.45) 1.35,1.88 2.05,1.18 10.56,1.18 13.03,3.64 14.19,3.64 14.52,3.98 17.99,3.98 18.79,4.78 18.79,4.78 19.04,4.78 19.29,4.78 19.71,4.78 20.39,5.46 21.2,5.46 22.1,6.36 v1(22.17,6.36)
  BOTTOM w0.15: U1.26 21.52,6.56 21.72,6.36 v1(22.17,6.36)
DP_ID: length 14.4
  TOP w0.15: J2.17 7.36,11.78 7.72,12.14 7.72,12.42 7.98,12.68 9.31,12.68 10,13.37 13.84,13.37 14.82,12.39 v1(14.82,10.86)
  BOTTOM w0.15: U1.43 15.02,10.98 14.9,10.86 v1(14.82,10.86) 14.29,10.33 13.33,10.33 13.23,10.44 R6.2
FLASH_CS: length 18.4
  TOP w0.15: 29.3,19.8 R16.1 ; R16.1 29.31,19.03 27.93,17.65 v1(27.81,17.65) ; R16.1 29.31,19.99 29.3,20 U10.1
  L2 w0.15: v1(25.32,9.04) 25.38,9.09 25.38,10.71 24.43,11.66 24.43,13.43 24.72,13.72 24.72,15.22 25.19,15.7 25.77,15.7 26.56,16.49 26.56,17.32 26.88,17.65 v1(27.81,17.65)
  BOTTOM w0.15: v1(25.32,9.04) 25.4,9.11 25.4,9.7 25.11,9.98 U1.20
JTAG_TCK: length 27.7
  TOP w0.15: v1(2.67,4.51) 2.67,4.72 3.35,5.4 P1.4
  L3 w0.15: 22.64,6.81 22.59,6.86 v1(22.58,6.86) 21.99,6.86 21.14,6.01 21.14,6.01 20.97,5.84 19.43,5.84 19.35,5.76 19.34,5.76 17.86,4.28 14.4,4.28 14.06,3.94 12.9,3.94 10.43,1.48 3.5,1.48 2.67,2.31 v1(2.67,4.51)
  BOTTOM w0.15: U1.25 22.02,7.06 22.22,6.86 v1(22.58,6.86)
JTAG_TMS: length 35.2
  TOP w0.15: v1(2.12,7.91) 2.12,6.35 P1.2
  L3 w0.15: v1(2.12,7.91) 0.88,6.67 0.88,1.9 1.9,0.88 10.68,0.88 13.15,3.34 13.39,3.34 14.31,3.34 14.65,3.68 18.11,3.68 18.92,4.48 19.16,4.48 20.3,4.48 21.69,4.48 23.21,6 v1(23.21,6.77)
  BOTTOM w0.15: v1(23.21,6.77) 23.21,7.17 22.74,7.63 U1.24
LED1: length 21
  TOP w0.15: v1(9.16,13.25) 9.6,13.68 14,13.68 14.64,13.03 15.12,13.03 15.28,13.19 23.82,13.19 v1(25.03,11.98)
  BOTTOM w0.15: U1.16 v1(25.03,11.98) ; CR1.2 9.16,13.72 v1(9.16,13.25)
LED2: length 26.3
  TOP w0.15: v1(10.95,10.51) 10.95,10.05 13.94,7.07 16.62,7.07 16.96,6.72 19.38,6.72 20.97,5.13 22.97,5.13 23.22,5.38 23.68,5.38 24.6,6.3 24.6,7.44 24.85,7.69 24.85,9.24 24.9,9.29 v1(24.9,9.5)
  BOTTOM w0.15: v1(10.95,10.51) 10.63,10.83 9.96,10.83 8.21,12.58 8.21,13.15 ; v1(24.9,9.5) 24.62,9.5 24.61,9.48 U1.21
MIC PWR: length 19
  TOP w0.2: U6.5 38.24,9.75 38.24,8.67 C23.1 38.24,8.64 v1(37.7,8.64)
  L2 w0.2: v1(26.52,8.16) 26.85,8.5 29.64,8.5 30.48,7.66 36.72,7.66 v1(37.7,8.64)
  BOTTOM w0.2: v1(26.52,8.16) 26.52,8.43 25.82,9.12 25.82,9.74 25.25,10.31 23.82,10.31 23.64,10.48 U1.19
MPU INT: length 15.8
  L2 w0.15: v1(30.47,8.44) 30.06,8.84 26.5,8.84 26.22,8.56 24.72,8.56 24.13,9.16 24.13,13.56 24.42,13.85 24.42,14.35 24.14,14.63 23.48,14.63 23.13,14.28 v1(22.6,14.28)
  BOTTOM w0.15: U8.12 30.47,9.26 v1(30.47,8.44) ; U1.12 22.53,14.21 v1(22.6,14.28)
MPU PWR: length 23.5
  BOTTOM w0.15: U8.13 C25.1
  BOTTOM w0.2: 31.79,10.91 C26.1 U8.8 ; 31.79,10.91 31.79,10.9 31.79,9.03 30.2,7.44 29.97,7.44 ; 31.79,10.91 31.79,11.62 30.75,12.66 28.13,12.66 28.09,12.7 R4.2 27.97,12.68 U8.1 ; U1.18 23.68,10.98 24,10.66 R5.2 ; R5.2 26.59,10.66 26.75,10.51 U8.22 ; R5.2 26.17,10.63 26.17,9.38 28.11,7.44 29.97,7.44 ; 29.97,7.44 C25.1
NRESET: length 13.2
  TOP w0.15: v1(7.17,7.84) 7.17,6.32 P1.10
  L2 w0.15: v1(11.57,7.76) 11.57,8.21 11.28,8.49 10.73,8.49 10.07,7.84 v1(7.17,7.84)
  BOTTOM w0.15: 14.39,7.06 R1.1 ; 14.39,7.06 15.51,7.06 15.93,6.63 16.69,6.63 17.02,6.96 U1.35 ; 14.39,7.06 C12.1 13.61,7.06 13.1,7.57 11.75,7.57 v1(11.57,7.76)
POWER GOOD: length 6.9
  TOP w0.15: J2.19 6.07,9.93 v1(7.39,8.61)
  BOTTOM w0.15: R28.2 6.88,8.61 v1(7.39,8.61) 7.71,8.29 7.71,7.5 8.08,7.12 8.42,7.12 8.73,6.81 U2.B2
REED: length 22.9
  TOP w0.15: R11.1 v1(39.37,16.37)
  BOTTOM w0.15: U1.8 20.02,14.49 21.61,16.08 24.03,16.08 24.94,15.17 24.94,15.17 25.13,14.99 27.89,14.99 28.56,15.65 29.16,15.65 29.16,15.65 29.19,15.65 30.19,14.66 35.88,14.66 36.93,15.71 38.71,15.71 v1(39.37,16.37)
SCL: length 66.4
  TOP w0.15: v1(23,14.82) 22.47,14.82 21.75,14.1 21.74,14.1 21.73,14.1 15.88,14.1 15.38,14.6 8.69,14.6 8.49,14.8 ; 8.49,14.8 8.49,14.82 v1(8.93,15.26) ; 8.49,14.8 7.07,16.22 J2.3 5.38,16.22 4.85,16.76 4.85,20.14 v1(6.22,21.51)
  L2 w0.15: v1(34.39,17.81) 37,17.81 38.32,16.49 38.32,14.28 v1(38.64,13.96)
  BOTTOM w0.15: U7.4 8.54,16.31 8.93,15.93 v1(8.93,15.26) ; U3.4 6.26,21.46 v1(6.22,21.51) ; U4.B3 v1(34.39,17.81) ; U9.A1 34.62,6.77 35.28,7.42 37.64,7.42 39.98,9.77 39.98,13.07 39.09,13.96 v1(38.64,13.96) 38.32,14.28 37.23,14.28 R3.1 37.21,14.26 36.61,14.26 36.4,14.06 30.69,14.06 29.94,14.06 29.94,14.06 24.71,14.06 23.95,14.82 v1(23,14.82) 22.98,14.82 22.97,14.83 21.81,14.83 21.52,14.54 U1.11
SCL HP: length 5.6
  BOTTOM w0.15: U1.15 25.45,12.48 26.21,11.72 R5.1 26.55,11.22 26.87,10.91 U8.23
SDA: length 76.8
  TOP w0.15: J2.4 3.75,16.22 4.55,17.02 4.55,20.51 6.15,22.11 v1(7.02,22.11) 7.02,21.55 5.35,19.88 5.35,18.94 7.87,16.42 7.87,16.42 8.41,15.88 v1(8.41,15.68) 8.46,15.73 9.12,15.73 9.96,14.9 15.51,14.9 16,14.4 21.61,14.4 v1(22.52,15.31)
  L2 w0.15: v1(34.37,18.81) 36.43,18.81 38.76,16.48 38.76,15.3 v1(39.29,14.77) 39.29,14.73 39.4,14.63 39.4,13.12 v1(39.3,13.02)
  BOTTOM w0.15: U7.6 7.24,16.31 7.87,15.68 8.3,15.68 ; 8.3,15.68 v1(8.41,15.68) ; 8.3,15.68 8.24,15.74 ; v1(39.3,13.02) 39.68,12.64 39.68,9.89 37.51,7.72 35.15,7.72 33.62,6.19 U9.A2 ; U4.C3 v1(34.37,18.81) ; U1.10 21.02,14.63 21.7,15.31 v1(22.52,15.31) 23.85,15.31 23.85,15.31 23.93,15.31 24.86,14.38 24.86,14.38 24.89,14.36 36,14.36 37.06,15.41 38.66,15.41 R2.1 v1(39.29,14.77) ; v1(7.02,22.11) 7.33,22.11 7.57,21.87 U3.3
SDA HP: length 6.2
  BOTTOM w0.15: U8.24 27.43,11.32 R4.1 27.05,12.7 26.84,12.91 22.81,12.91 U1.14
TMP RDY: length 27.1
  L2 w0.15: v1(33.37,18.81) 33.37,18.16 34.2,17.33 v1(36.51,17.33)
  BOTTOM w0.15: U4.C2 v1(33.37,18.81) ; U1.6 19.02,14.46 19.14,14.59 19.14,14.61 21.25,16.72 24.25,16.72 25.01,15.95 29.28,15.95 29.32,15.95 30.31,14.96 35.67,14.96 36.74,16.02 36.74,17.09 36.51,17.32 v1(36.51,17.33) 36.51,17.49 36.76,17.73 37.18,17.73 R50.1
N256047: length 1.1
  BOTTOM w0.15: R10.2 6.71,15.47 CR1.1
N546170: length 0.7
  BOTTOM w0.15: U8.10 31.22,10.11 C27.2
N553359: length 5.7
  TOP w0.3: BZ1.2 10.05,19.21 11.51,20.67 11.51,20.67 11.92,21.08 Q1.3
N553749: length 4.8
  TOP w0.15: R7.1 10.67,19.01 11.79,20.13 Q1.1
N553802: length 1
  TOP w0.15: R8.2 14.45,22.94 Q1.2
N567147: length 9.6
  L2 w0.3: v1(8.5,5.12) 8.23,5.12 7.67,5.68 7.67,6.9 8.18,7.42 10.58,7.42 10.62,7.46 v1(10.63,7.46)
  BOTTOM w0.3: U2.A2 9.92,6.83 C29.1 10.3,7.8 10.61,7.49 ; 10.61,7.49 10.54,7.49 ; 10.61,7.49 v1(10.63,7.46) ; R12.2 8.69,5.31 v1(8.5,5.12) 8.19,4.81 7.5,4.81 R23.2
N570925: length 1.2
  BOTTOM w0.15: U1.23 23.9,8.48 C16.1
N571021: length 6.6
  BOTTOM w0.15: U1.3 17.52,14.49 17.79,14.76 17.79,15.09 20.26,17.55 20.57,17.55 ; 20.57,17.55 20.58,17.54 ; 20.57,17.55 20.54,17.58 ; 20.54,17.58 21.56,17.58 21.56,17.58 Y1.1 ; 20.54,17.58 C14.1
N571113: length 8.1
  BOTTOM w0.15: C18.2 10.2,12.01 Y2.3 10.2,13.32 11.16,14.28 12.35,14.28 13.43,13.2 13.98,13.2 14.69,12.48 U1.46
N574713: length 1.7
  BOTTOM w0.3: C32.2 16.3,16.56 16.31,16.56 ; 16.31,16.56 L2.1 ; 16.31,16.56 C11.1
N574825: length 1.6
  BOTTOM w0.3: L3.1 17.25,16.54 ; 17.25,16.54 17.25,16.54 C33.2 ; 17.25,16.54 C13.2
N574829: length 2.5
  BOTTOM w0.3: C11.2 16.77,17.7 ; 16.77,17.7 ANT1.1 ANT2.2 ; 16.77,17.7 17.24,17.7 L3.2
N584161: length 6.1
  BOTTOM w0.15: C17.2 11.93,15.45 Y2.1 11.93,15.35 13.78,13.5 14.13,13.5 14.64,12.98 U1.47
N591795: length 1.6
  BOTTOM w0.2: 17.56,19.22 ANT4.1
  BOTTOM w0.3: ANT3.2 ANT1.2 ; ANT1.2 16.78,19.22 ; ANT1.2 17.55,19.23 17.56,19.22
N593616: length 2
  TOP w0.2: v1(38.07,23.86) 38.13,23.92 38.13,24.64 38.3,24.81 SW1.2
  BOTTOM w0.15: R21.1 v1(38.07,23.86)
N593675: length 7.1
  TOP w0.15: v1(2.49,27.47) 3.18,27.47 3.37,27.66 SW2.2
  BOTTOM w0.15: v1(2.49,27.47) 0.86,25.84 0.86,23.71 1.27,23.3 R22.1
N595089: length 9.5
  BOTTOM w0.15: U1.4 18.09,14.28 18.09,14.91 18.81,15.62 19.73,15.62 21.13,17.02 23.33,17.02 24.06,17.75 Y1.2 24.25,17.95 C15.1
N606617: length 0.7
  BOTTOM w0.2: 17.56,20.02 ANT4.2
  BOTTOM w0.3: J1.2 17.54,20.04 17.56,20.02
N607699: length 1.6
  BOTTOM w0.3: ANT6.2 15.27,23.51 A1.1 15.35,24.16 ANT5.2
N615152: length 0.8
  TOP w0.15: U10.7 26.15,21.04 R17.1
N615160: length 0.9
  TOP w0.15: 30.2,21.54 R18.1 29.82,21.54 29.81,21.54 U10.3
N620089: length 2.8
  TOP w0.5: BAT+.1 38.51,2.5 37.41,1.39 R26.1
N624014: length 1
  BOTTOM w0.15: R27.2 5.82,13.14 5.83,13.15 CR3.1
N629965: length 0.9
  BOTTOM w0.3: C32.1 16.52,14.82 U1.1
N629990: length 0.9
  BOTTOM w0.3: C33.1 17.02,14.8 U1.2
N631854: length 1
  BOTTOM w0.15: 16.88,24.09 16.87,24.09 ANT5.1
  BOTTOM w0.3: J1.1 17.47,23.5 16.88,24.09
N674409: length 11
  TOP w0.15: 40.24,12.05 39.74,12.55 36.31,12.55 35.01,11.24 35.01,9.55 35.55,9.01 37.25,9.01 37.44,9.19 U6.4 ; 40.24,12.05 40.2,12.05 ; 40.24,12.05 R31.1
N674491: length 1.7
  TOP w0.15: 39.07,12.15 39.07,12.09 R32.1 ; 39.07,12.15 39.21,12.15 ; 39.07,12.15 38.39,12.15 38.26,12.02 U6.1
N703623: length 1.4
  TOP w0.15: SW3.2 R11.2

## Copper pours and planes (outline as drawn; the poured copper is in the pictures)
GND on BOTTOM (solid shape): 29.99,30.19 13.59,30.19 13.59,28.39 14.59,28.39 14.59,27.89 15.5,26.57 15.5,24.49 15.04,24.49 15.04,26.42 14.52,27.18 11.39,27.18 11.39,28.39 12.39,28.39 12.39,29.19 6.59,29.19 6.59,26.52 14.59,26.52 14.59,24.49 13.59,24.49 13.59,25.23 12.39,25.23 12.39,24.49 11.39,24.49 11.39,25.23 4.41,25.23 4.41,31.4 29.99,31.4
GND on TOP: 0.5,0.5 0.5,24.41 5.14,24.41 5.14,31.5 33.7,31.5 33.7,24.41 41.5,24.41 41.5,0.5 31.15,0.5 21,3.46 10.85,0.5 ; 7 cut-outs
GND on BOTTOM: 0.5,0.5 0.5,24.41 5.21,24.41 5.21,31.5 34.68,31.52 34.68,24.41 41.5,24.41 41.5,0.5 31.15,0.5 21,3.46 10.85,0.5 ; 21 cut-outs
GND on L2: 0.51,0.5 0.51,24.41 5.21,24.41 5.21,31.5 34.72,31.5 34.72,24.41 41.5,24.41 41.5,0.5 31.15,0.5 21,3.46 10.85,0.5 ; 10 cut-outs
GND on L3: 0.5,0.5 0.5,24.41 5.19,24.41 5.19,31.5 34.81,31.5 34.81,24.41 41.5,24.41 41.5,0.5 31.15,0.5 21,3.46 10.85,0.5 ; 7 cut-outs
VDD_BATT on TOP, BOTTOM: 8.72,4.81 8.72,3.41 10.72,3.41 10.72,4.81

## Text on the board
Ref Des/Silkscreen Bottom: BAT- | MODEL: CC2650SensorTag | REV: 1.3 | BAT+
Ref Des/Silkscreen Top: BAT- | BAT+ | R007-AD0051 | Pb
XSECTION_CHART: *  SURFACE - AIR 0 MM | L1: TOP CONDUCTOR - COPPER 0.035 MM | *  DIELECTRIC - FR-4 0.175 MM | L2: L2 PLANE - COPPER 0.035 MM | *  DIELECTRIC - FR-4 1.01 MM | L3: L3 PLANE - COPPER 0.035 MM | L4: BOTTOM CONDUCTOR - COPPER 0.035 MM | DESIGN CROSS SECTION CHART | ___________________________ | TOTAL THICKNESS 1.5 MM
DEVICE_TYPE_TOP: 1 | 10
DISPLAY_TOP: FIGURE | SIZE | 0.2 | 0.6 | 0.9 | 3.0x1.0 | DRILL CHART: TOP to BOTTOM | ALL UNITS ARE IN MILLIMETERS | PLATED | NON-PLATED | QTY | 308 | 1 | 2 | 4
